# EAGLE board ECEN Autonomous SOLAR TRACKER (EAGLE 9.6.2)
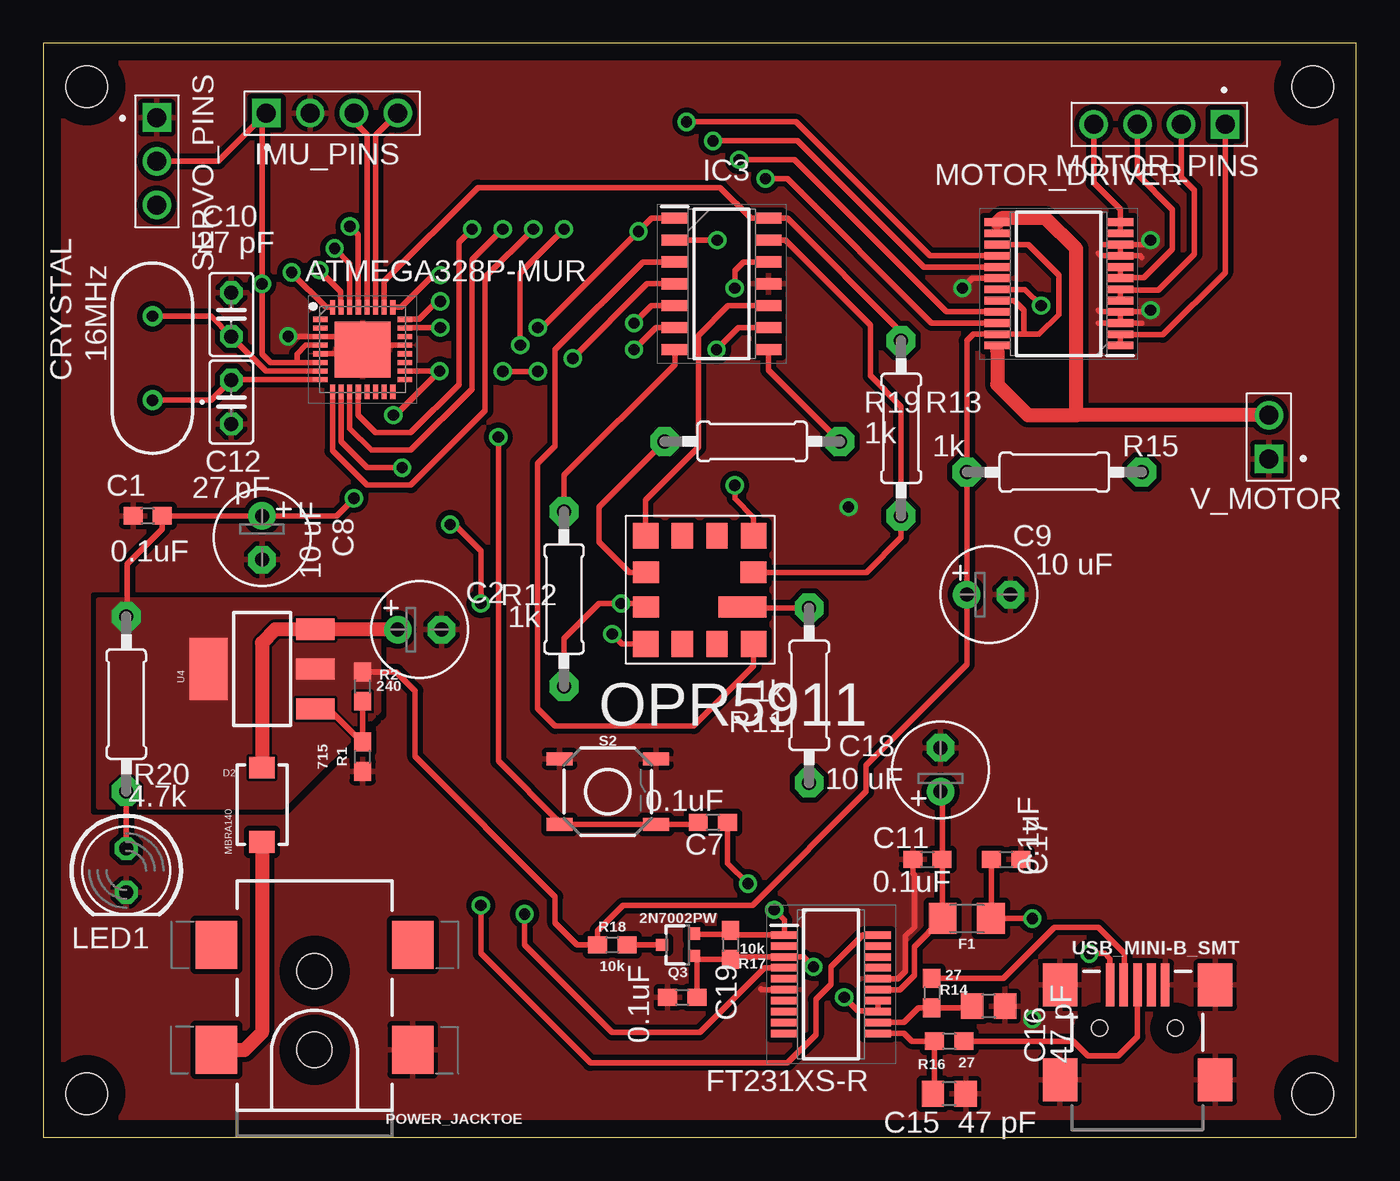
[diagram p0: board, top side]
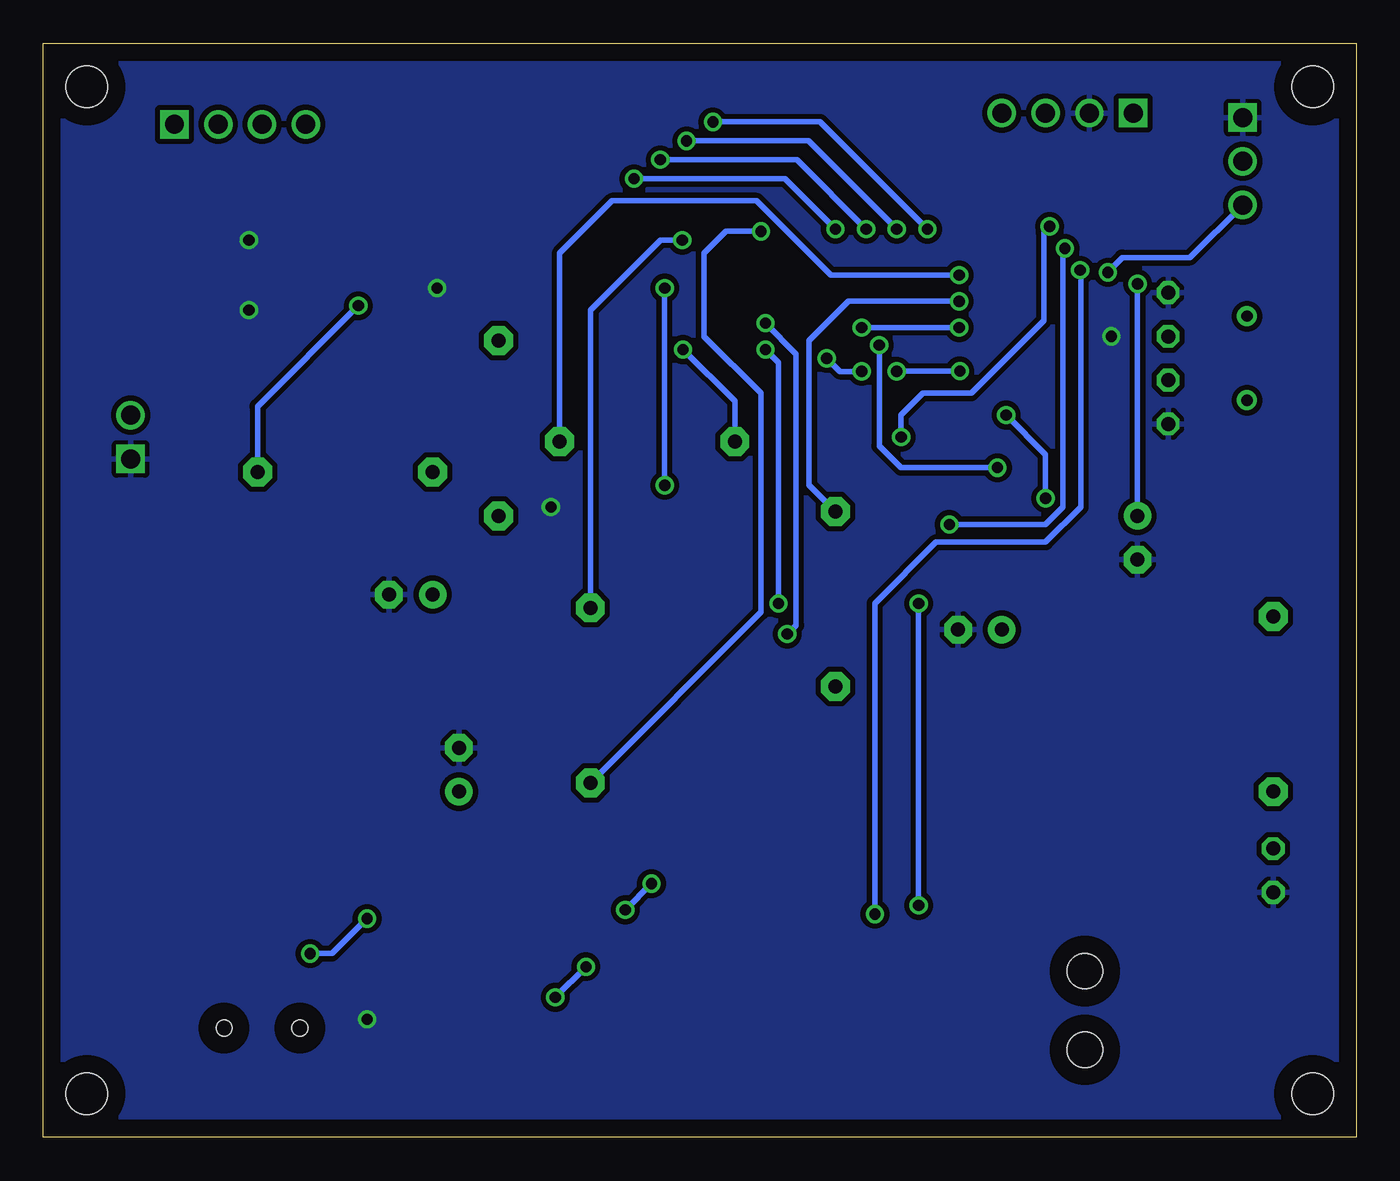
[diagram p1: board, bottom side, seen from below]

Size 76.2 x 63.5 mm. Coordinates in mm from the lower left corner, seen from the top.
Outline: 0,0 76.2,0 76.2,63.5 0,63.5 0,0
Copper layers (1*16): Top 0.035mm / dielectric 1.5mm / Bottom 0.035mm
Design rules "default *": minimum track width 6mil, minimum drill 0.6mm, track to track 6mil, track to pad 6mil, pad to pad 6mil, via to via 6mil, smd to smd 6mil, copper to edge 40mil, drill to drill 6mil, minimum pad ring 10mil, minimum via ring 8mil, stop-mask expansion 4mil, vias tented up to drill 0mil, thermal gap 10mil
Holes 2.4 mm at 2.54,2.54 2.54,60.96 73.66,60.96 73.66,2.54

## Footprints (pad centres in the part's own frame; a part is rotated, then mirrored left to right if it is on the bottom)
C0603 = smd 1.1 x 1: 1 -0.85,0; 2 0.85,0
E2,5-6 = drill 0.813 pad 1.6: + -1.27,0 | drill 0.813 pad 1.6 octagon: - 1.27,0
C025-025X050 = drill 0.813 octagon: 1 -1.27,0; 2 1.27,0
C0805 = smd 1.3 x 1.5: 1 -0.95,0; 2 0.95,0
HC49 = drill 0.65 pad 1.1: 1 -2.44,0; 2 2.44,0
SMA-DIODE = smd 1.27 x 1.47: A -2.15,0; C 2.15,0
1206 = smd 1.6 x 1.8: 1 -1.4,0; 2 1.4,0
QFN50P500X500X100-33N = smd 0.85 x 0.3: 1 -2.45,1.75; 2 -2.45,1.25; 3 -2.45,0.75; 4 -2.45,0.25; 5 -2.45,-0.25; 6 -2.45,-0.75; 7 -2.45,-1.25; 8 -2.45,-1.75; 17 2.45,-1.75; 18 2.45,-1.25; 19 2.45,-0.75; 20 2.45,-0.25; 21 2.45,0.25; 22 2.45,0.75; 23 2.45,1.25; 24 2.45,1.75 | smd 0.3 x 0.85: 9 -1.75,-2.45; 10 -1.25,-2.45; 11 -0.75,-2.45; 12 -0.25,-2.45; 13 0.25,-2.45; 14 0.75,-2.45; 15 1.25,-2.45; 16 1.75,-2.45; 25 1.75,2.45; 26 1.25,2.45; 27 0.75,2.45; 28 0.25,2.45; 29 -0.25,2.45; 30 -0.75,2.45; 31 -1.25,2.45; 32 -1.75,2.45 | smd 3.25 x 3.25: 33 0,0
SOP64P599X175-20N = smd 1.526 x 0.435: 1 -2.712,2.858; 2 -2.712,2.222; 3 -2.712,1.588; 4 -2.712,0.952; 5 -2.712,0.318; 6 -2.712,-0.318; 7 -2.712,-0.952; 8 -2.712,-1.588; 9 -2.712,-2.222; 10 -2.712,-2.858; 11 2.712,-2.858; 12 2.712,-2.222; 13 2.712,-1.588; 14 2.712,-0.952; 15 2.712,-0.318; 16 2.712,0.318; 17 2.712,0.952; 18 2.712,1.588; 19 2.712,2.222; 20 2.712,2.858
SOIC127P600X175-14N = smd 1.525 x 0.65: 1 -2.712,3.81; 2 -2.712,2.54; 3 -2.712,1.27; 4 -2.712,0; 5 -2.712,-1.27; 6 -2.712,-2.54; 7 -2.712,-3.81; 8 2.712,-3.81; 9 2.712,-2.54; 10 2.712,-1.27; 11 2.712,0; 12 2.712,1.27; 13 2.712,2.54; 14 2.712,3.81
POWER_JACK_SMD_OVERPASTE_TOE = smd 2.8 x 2.4: GND 0,-5.7; P$4 6.1,-5.7; VIN0 0,5.7; VIN1 6.1,5.7 | hole 2.032: 0,0; 4.572,0
USB-MINIB = smd 2.5 x 0.5: D+ 2.5,0; D- 2.5,0.8; GND 2.5,-1.6; ID 2.5,-0.8; VBUS 2.5,1.6 | smd 2.5 x 2: S1 -3,4.5; S2 2.5,4.5; S3 -3,-4.5; S4 2.5,-4.5 | hole 0.9: 0,2.2; 0,-2.2
61300411121 = drill 1.1 square: 1 -3.81,0 | drill 1.1: 2 -1.27,0; 3 1.27,0; 4 3.81,0
LED5MM = drill 0.813 octagon: A -1.27,0; K 1.27,0
SOP65P760X160-24N = smd 1.525 x 0.45: 1 -3.562,3.575; 2 -3.562,2.925; 3 -3.562,2.275; 4 -3.562,1.625; 5 -3.562,0.975; 6 -3.562,0.325; 7 -3.562,-0.325; 8 -3.562,-0.975; 9 -3.562,-1.625; 10 -3.562,-2.275; 11 -3.562,-2.925; 12 -3.562,-3.575; 13 3.562,-3.575; 14 3.562,-2.925; 15 3.562,-2.275; 16 3.562,-1.625; 17 3.562,-0.975; 18 3.562,-0.325; 19 3.562,0.325; 20 3.562,0.975; 21 3.562,1.625; 22 3.562,2.275; 23 3.562,2.925; 24 3.562,3.575
OPR5911-12 = smd 2.78 x 1.245: 1 6.349,2.904 | smd 1.47 x 1.499: 2 7.004,0.75; 5 0.738,0.75; 8 0.738,7.037; 11 7.004,7.037 | smd 1.245 x 1.499: 3 4.873,0.764; 4 2.863,0.764; 9 2.863,7.037; 10 4.873,7.037 | smd 1.499 x 1.245: 6 0.751,2.904; 7 0.751,4.914; 12 6.991,4.914
SOT323 = smd 0.7 x 0.7: 1 -0.65,-0.925; 2 0.65,-0.925; 3 0,0.925
0603 = smd 1.1 x 1: 1 -0.85,0; 2 0.85,0
0207/10 = drill 0.813 pad 1.676 octagon: 1 -5.08,0; 2 5.08,0
TACTILE_SWITCH_SMD_5.2MM = smd 1.524 x 0.762: 1 -2.794,1.905; 2 2.794,1.905; 3 -2.794,-1.905; 4 2.794,-1.905
61300311121 = drill 1.1 square: 1 -2.54,0 | drill 1.1: 2 0,0; 3 2.54,0
SOT223 = smd 1.219 x 2.235: 1 -2.311,-3.099; 2 0,-3.099; 3 2.311,-3.099 | smd 3.6 x 2.2: 4 0,3.099
61300211121 = drill 1.1 square: 1 -1.27,0 | drill 1.1: 2 1.27,0

## Placement (x,y rotation side)
C1  0.1uF  [C0603]  6.07,36.07 180 top
C2  47 uF  [E2,5-6]  21.84,29.46 0 top
C7  0.1uF  [C0603]  38.86,18.29 180 top
C8  10 uF  [E2,5-6]  12.7,34.8 270 top
C9  10 uF  [E2,5-6]  54.86,31.5 0 top
C10  27 pF  [C025-025X050]  10.92,47.75 90 top
C11  0.1uF  [C0603]  51.31,16.13 0 top
C12  27 pF  [C025-025X050]  10.92,42.67 90 top
C15  47 pF  [C0805]  52.58,2.54 180 top
C16  47 pF  [C0805]  54.86,7.62 180 top
C17  0.1uF  [C0603]  55.88,16.13 0 top
C18  10 uF  [E2,5-6]  52.07,21.34 90 top
C19  0.1uF  [C0603]  37.08,8.13 180 top
CRYSTAL  16MHz  [HC49]  6.35,45.21 90 top
D2  MBRA140  [SMA-DIODE]  12.7,19.3 90 top
F1  6V/0.5A  [1206]  53.59,12.7 180 top
IC1  ATMEGA328P-MUR  [QFN50P500X500X100-33N]  18.54,45.72 0 top
IC2  FT231XS-R  [SOP64P599X175-20N]  45.72,8.89 0 top
IC3  OPA4140AID  [SOIC127P600X175-14N]  39.37,49.53 0 top
J1  POWER_JACKTOE  [POWER_JACK_SMD_OVERPASTE_TOE]  15.75,5.08 90 top
J2  USB_MINI-B_SMT  [USB-MINIB]  63.5,6.35 90 top
J4  IMU_PINS  [61300411121]  16.76,59.44 0 top
LED1  [LED5MM]  4.83,15.49 270 top
MOTOR_DRIVER  TB6612FNG,C,8,EL  [SOP65P760X160-24N]  58.93,49.53 180 top
MOTOR_PINS  61300411121  [61300411121]  64.77,58.78 180 top
OPR5911  OPR5911  [OPR5911-12]  34.23,27.88 0 top
Q3  2N7002PW  [SOT323]  36.83,11.18 90 top
R1  715  [0603]  18.54,22.1 90 top
R2  240  [0603]  18.54,26.16 90 top
R11  1k  [0207/10]  44.45,25.65 90 top
R12  1k  [0207/10]  30.23,31.24 270 top
R13  1k  [0207/10]  49.78,41.15 90 top
R14  27  [0603]  51.56,8.38 270 top
R15  1k  [0207/10]  58.67,38.61 0 top
R16  27  [0603]  52.58,5.59 180 top
R17  10k  [0603]  39.88,11.18 270 top
R18  10k  [0603]  33.02,11.18 180 top
R19  1k  [0207/10]  41.15,40.39 0 top
R20  4.7k  [0207/10]  4.83,25.15 90 top
S2  [TACTILE_SWITCH_SMD_5.2MM]  32.77,20.07 0 top
SERVO_PINS  61300311121  [61300311121]  6.6,56.64 270 top
U4  [SOT223]  12.7,27.18 90 top
V_MOTOR  61300211121  [61300211121]  71.12,40.64 90 top

## Library data of the parts
C1 C2 C7-C12 C15-C19 = rcl; SPICEPREFIX: C
CRYSTAL = HC-49_U-S16000000ABJB; DESCRIPTION: Crystals 16MHz 18pF HC49S THROUGH HOLE; HEIGHT: mm; MANUFACTURER_NAME: Citizen Finetech Miyota; MANUFACTURER_PART_NUMBER: HC-49/U-S16000000ABJB; MOUSER_PART_NUMBER: 695-HC49US16.0ABJB; MOUSER_PRICE-STOCK: https://www.mouser.co.uk/ProductDetail/Citizen-FineDevice/HC-49-U-S16000000ABJB?qs=byeeYqUIh0M5kN9OYTo1Hw%3D%3D
D2 = MBRA140; AVAILABILITY: Bad; DESCRIPTION: Diode Schottky 40V 1A Surface Mount SMA; MF: ON Semiconductor; MP: MBRA140; PACKAGE: DO-214 ON Semiconductor; PRICE: None
F1 = SparkFun-Fuses; PROD_ID: RES-08585
IC1 = ATMEGA328P-MUR; ARROW_PART_NUMBER: ATMEGA328P-MUR; ARROW_PRICE-STOCK: https://www.arrow.com/en/products/atmega328p-mur/microchip-technology; DESCRIPTION: MCU 8-bit ATmega AVR RISC 32KB Flash 2.5V/3.3V/5V 32-Pin VQFN EP T/R; HEIGHT: 1mm; MANUFACTURER_NAME: Microchip; MANUFACTURER_PART_NUMBER: ATMEGA328P-MUR; MOUSER_PART_NUMBER: 556-ATMEGA328P-MUR; MOUSER_PRICE-STOCK: https://www.mouser.co.uk/ProductDetail/Microchip-Technology-Atmel/ATMEGA328P-MUR?qs=6Dg1WZIWLC7u6Xm9ddn7Uw%3D%3D
IC2 = FT231XS-R; DESCRIPTION: USB SSOP-20 RoHS; HEIGHT: 1.753mm; MANUFACTURER_NAME: Future Designs; MANUFACTURER_PART_NUMBER: FT231XS-R
IC3 = OPA4140AID; ARROW_PART_NUMBER: OPA4140AID; ARROW_PRICE-STOCK: https://www.arrow.com/en/products/opa4140aid/texas-instruments; DESCRIPTION: TI,OPA4140AID,IC,Op Amp Texas Instruments OPA4140AID, Quad JFET Op Amp, 11MHz Rail-Rail, 4.5 36 V, 14-Pin SOIC; HEIGHT: 1.75mm; MANUFACTURER_NAME: Texas Instruments; MANUFACTURER_PART_NUMBER: OPA4140AID; MOUSER_PART_NUMBER: 595-OPA4140AID; MOUSER_PRICE-STOCK: https://www.mouser.com/Search/Refine.aspx?Keyword=595-OPA4140AID
J1 = SparkFun-Connectors; PROD_ID: CONN-08106; SF_ID: PRT-12748
J2 = SparkFun-Connectors; PROD_ID: CONN-08193; SF_ID: PRT-00587
J4 MOTOR_PINS = Headers; CREATED_BY: PCBLayout.com; DIGI_KEY_PART_NUMBER: 732-5317-ND; MANUFACTURER: Wurth Electronics Inc.; MPN: 61300411121
LED1 = led
MOTOR_DRIVER = TB6612FNG_C_8_EL; ARROW_PART_NUMBER: TB6612FNG,C,8,EL; ARROW_PRICE-STOCK: https://www.arrow.com/en/products/tb6612fngc8el/toshiba; DESCRIPTION: otor / Motion / Ignition Controllers & Drivers Brush Motor Driver IC; HEIGHT: 1.6mm; MANUFACTURER_NAME: Toshiba; MANUFACTURER_PART_NUMBER: TB6612FNG,C,8,EL; MOUSER_PART_NUMBER: 757-TB6612FNGC8EL; MOUSER_PRICE-STOCK: https://www.mouser.co.uk/ProductDetail/Toshiba/TB6612FNGC8EL?qs=rsevcuukUAy2UalRuv4E%2FQ%3D%3D
OPR5911 = OPR5911
Q3 = SparkFun-DiscreteSemi; PROD_ID: TRANS-11151
R1 = SparkFun-Resistors; PROD_ID: RES-07850
R2 = SparkFun-Resistors; PROD_ID: RES-07849
R11-R13 R15 R19 R20 = adafruit
R14 R16-R18 = SparkFun-Resistors; PROD_ID: RES-07857
S2 = SparkFun-Switches; PROD_ID: SWCH-08247; SF_SKU: COM-08720
SERVO_PINS = Headers; CREATED_BY: PCBLayout.com; DIGI_KEY_PART_NUMBER: 732-5316-ND; MANUFACTURER: Wurth Electronics Inc.; MPN: 61300311121
U4 = SparkFun-IC-Power; PROD_ID: VREG-08170
V_MOTOR = Headers; CREATED_BY: PCBLayout.com; DIGI_KEY_PART_NUMBER: 732-5315-ND; MANUFACTURER: Wurth Electronics Inc.; MPN: 61300211121

## Nets
3V3OUT: C19.1 IC2.3 IC2.13 IC2.14 Q3.1 R17.2
+IN_A: IC3.3 OPR5911.2
+IN_B: IC3.5 OPR5911.5
+IN_C: IC3.10 OPR5911.8
+IN_D: IC3.12 OPR5911.11
A0: IC1.23 IC3.1 R11.1
A1: IC1.24 IC3.7 R12.1
A2: IC1.25 IC3.8 R19.2
A3: IC1.26 IC3.14 R13.2
A+: MOTOR_DRIVER.1 MOTOR_DRIVER.2 MOTOR_PINS.1
A-: MOTOR_DRIVER.5 MOTOR_DRIVER.6 MOTOR_PINS.2
AIN1: IC1.9 MOTOR_DRIVER.21
AIN2: IC1.10 MOTOR_DRIVER.22
B+: MOTOR_DRIVER.11 MOTOR_DRIVER.12 MOTOR_PINS.4
B-: MOTOR_DRIVER.7 MOTOR_DRIVER.8 MOTOR_PINS.3
BIN1: IC1.11 MOTOR_DRIVER.17
BIN2: IC1.12 MOTOR_DRIVER.16
DTR: C7.1 IC2.1 Q3.2 R17.1
GND: C1.2 C2.- C8.- C9.- C10.2 C11.1 C12.1 C15.1 C16.1 C17.2 C18.- C19.2 IC1.3 IC1.5 IC1.21 IC1.33 IC2.6 IC2.16 IC3.11 J1.GND J2.GND J2.S1 J2.S2 J2.S3 J2.S4 J4.2 LED1.K MOTOR_DRIVER.3 MOTOR_DRIVER.4 MOTOR_DRIVER.9 MOTOR_DRIVER.10 MOTOR_DRIVER.18 R1.1 S2.1 S2.2 SERVO_PINS.1 V_MOTOR.1
N$1: C2.+ D2.C U4.3
N$4: C15.2 IC2.11 R16.2
N$5: D2.A J1.VIN0
N$6: LED1.A R20.1
N$7: IC3.2 OPR5911.1 R11.2
N$8: R1.2 R2.1 U4.1
N$9: C7.2 IC1.29 S2.3 S2.4
N$10: C16.2 IC2.12 R14.2
N$11: IC3.6 OPR5911.6 R12.2
N$12: C10.1 CRYSTAL.2 IC1.7
N$13: IC3.13 OPR5911.12 R13.1
N$14: IC3.9 OPR5911.7 R19.1
N$15: C12.2 CRYSTAL.1 IC1.8
N$16: MOTOR_DRIVER.19 R15.2
N$21: C17.1 F1.1 J2.VBUS
N$22: J2.D- R14.1
N$23: J2.D+ R16.1
N$24: C11.2 C18.+ F1.2 IC2.15
N$26: Q3.3 R18.1
RX-I: IC1.30 IC2.20
SCL_3V: IC1.28 J4.3
SDA_3V: IC1.27 J4.4
SERVO_PWM: IC1.32 SERVO_PINS.3
TX-O: IC1.31 IC2.4
VIN: C1.1 C8.+ C9.+ IC1.4 IC1.6 IC1.18 IC3.4 J4.1 MOTOR_DRIVER.15 MOTOR_DRIVER.20 MOTOR_DRIVER.23 R2.2 R15.1 R18.2 R20.2 SERVO_PINS.2 U4.2 U4.4
VMOTOR: MOTOR_DRIVER.13 MOTOR_DRIVER.14 MOTOR_DRIVER.24 V_MOTOR.2

## Tracks (layer width: path | path; a pad name or v marks a point on that pad's centre or on a via)
3V3OUT  (via drill 0.65)
  Top 0.305: C19.1 37.93,10.35 Q3.1 37.95,10.33 R17.2 40.03,10.48 IC2.3 44.13,10.48 v44.7,9.91 | IC2.13 48.43,7.34 | 48.43,7.34 IC2.14 | v46.48,8.13 47.27,7.34 48.43,7.34
  Bottom 0.305: v44.7,9.91 v46.48,8.13
+IN_A
  Top 0.305: OPR5911.2 41.23,27.36 37.75,23.88 29.72,23.88 28.7,24.89 28.7,39.12 29.72,40.13 29.72,45.72 34.8,50.8 IC3.3
+IN_B  (via drill 0.65)
  Top 0.305: OPR5911.5 33.6,28.63 v33.02,29.21 | IC3.5 35.31,48.26 v34.29,47.24
  Bottom 0.305: v33.02,29.21 32.51,29.72 32.51,45.47 v34.29,47.24
+IN_C
  Top 0.305: OPR5911.8 34.97,37 38.02,40.06 38.02,46.53 39.75,48.26 IC3.10
+IN_D  (via drill 0.65)
  Top 0.305: OPR5911.11 41.23,35.98 40.13,37.08 v40.13,37.85 | v40.13,49.28 40.13,50.29 40.64,50.8 IC3.12
  Bottom 0.305: v40.13,37.85 v40.13,49.28
A0  (via drill 0.65)
  Top 0.305: v28.7,46.99 28.96,46.99 v34.54,52.58 35.31,53.34 IC3.1 | IC1.23 21.01,46.99 v23.05,46.99
  Bottom 0.305: R11.1 34.54,30.48 34.54,43.18 37.85,46.48 37.85,51.31 36.58,52.58 v34.54,52.58 | v23.05,46.99 v28.7,46.99
A1  (via drill 0.65)
  Top 0.305: R12.1 30.23,38.42 36.66,44.86 IC3.7 | IC1.24 21.83,47.47 22.87,48.51 v23.05,48.51
  Bottom 0.305: v23.05,48.51 29.46,48.51 31.75,46.23 31.75,37.85 R12.1
A2  (via drill 0.65)
  Top 0.305: R19.2 42.08,44.53 IC3.8 | IC1.25 20.77,48.17 22.64,50.04 v23.05,50.04
  Bottom 0.305: v23.05,50.04 30.48,50.04 34.8,54.36 43.18,54.36 46.23,51.31 R19.2
A3
  Top 0.305: IC1.26 19.79,49.67 25.24,55.12 39.29,55.12 41.07,53.34 IC3.14 43.18,53.34 49.78,46.74 R13.2
A+
  Top 0.305: MOTOR_DRIVER.2 62.49,46.48 | 62.49,46.48 MOTOR_DRIVER.1 | 62.49,46.48 62.58,46.57 64.97,46.57 68.58,50.19 MOTOR_PINS.1
A-
  Top 0.305: MOTOR_DRIVER.6 62.49,49.17 | 62.49,49.17 MOTOR_DRIVER.5 | 62.49,49.17 64.71,49.17 66.8,51.26 66.8,54.97 66.04,55.73 MOTOR_PINS.2
AIN1  (via drill 0.65)
  Top 0.305: IC1.9 16.79,39.85 18.8,37.85 21.34,37.85 25.65,42.16 25.65,49.91 v28.45,52.7 | MOTOR_DRIVER.21 52.42,47.91 43.6,56.73 v40.39,56.73
  Bottom 0.305: v40.39,56.73 32.47,56.73 v28.45,52.7
AIN2  (via drill 0.65)
  Top 0.305: IC1.10 17.29,40.37 18.8,38.86 v20.83,38.86 | MOTOR_DRIVER.22 51.55,47.26 43.18,55.63 v41.91,55.63 | v30.23,52.7 27.69,50.16 v27.69,45.97
  Bottom 0.305: v30.23,52.7 33.15,55.63 v41.91,55.63 | v20.83,38.86 26.42,38.86 27.69,40.13 v27.69,45.97
B+
  Top 0.305: MOTOR_DRIVER.11 MOTOR_DRIVER.12 62.49,53.87 60.96,55.4 MOTOR_PINS.4
B-
  Top 0.305: MOTOR_DRIVER.8 62.49,49.89 | 62.49,49.89 MOTOR_DRIVER.7 | MOTOR_PINS.3 63.5,55.88 65.53,53.85 65.53,51.55 63.87,49.89 62.49,49.89
BIN1  (via drill 0.65)
  Top 0.305: IC1.11 17.79,41.14 19.05,39.88 21.34,39.88 24.89,43.43 24.89,50.93 v26.67,52.7 | MOTOR_DRIVER.17 51.09,50.51 43.77,57.83 v38.86,57.83
  Bottom 0.305: v38.86,57.83 31.79,57.83 v26.67,52.7
BIN2  (via drill 0.65)
  Top 0.305: IC1.12 18.29,41.91 19.3,40.89 21.34,40.89 24.13,43.69 24.13,51.94 v24.89,52.7 | MOTOR_DRIVER.16 51.46,51.16 43.69,58.93 v37.34,58.93
  Bottom 0.305: v37.34,58.93 31.11,58.93 v24.89,52.7
DTR  (via drill 0.65)
  Top 0.305: Q3.2 37.81,11.77 39.62,11.77 R17.1 40.16,11.75 IC2.1 43.01,12.62 v42.42,13.21 | C7.1 39.71,15.91 v40.89,14.73
  Bottom 0.305: v40.89,14.73 v42.42,13.21
GND  (via drill 0.65)
  Top 0.305: MOTOR_DRIVER.3 MOTOR_DRIVER.4 | MOTOR_DRIVER.9 MOTOR_DRIVER.10 | MOTOR_DRIVER.18 53.92,49.85 v53.34,49.28 | MOTOR_DRIVER.10 63.76,51.8 63.77,51.82 64.01,51.82 v64.26,52.07 | MOTOR_DRIVER.4 64.16,47.91 v64.26,48.01 | v14.22,46.48 15.49,46.48 15.51,46.47 IC1.3 18.29,46.47 18.79,45.97 | IC1.5 18.29,45.47 IC1.33 18.79,45.97 | IC1.21 18.79,45.97 | MOTOR_DRIVER.10 61.48,51.8 61.47,51.82 | MOTOR_DRIVER.9 61.37,51.16 61.21,51.31 | MOTOR_DRIVER.9 63.65,51.16 63.75,51.05 | MOTOR_DRIVER.3 63.74,47.26 63.75,47.24 | MOTOR_DRIVER.3 62.48,47.24 61.21,47.24 | MOTOR_DRIVER.4 61.31,47.91 61.21,48.01 | IC2.6 41.72,8.57 41.66,8.64 | IC2.16 49.59,9.21 50.04,9.65 50.04,11.68 50.55,12.19 50.55,15.24 50.46,15.33 C11.1
  other vias: 46.74,36.58 57.4,6.86
  pour Top (isolate 0.305, rank 2): -2.54,-2.54 -2.54,66.04 76.71,66.04 76.71,-2.54
  pour Bottom (isolate 0.305): -3.81,-2.54 -3.81,66.04 77.22,66.04 77.22,-2.54
N$1
  Top 0.305: 20.55,29.49 C2.+
  Top 0.813: D2.C 12.7,28.7 13.49,29.49 U4.3 20.55,29.49
N$4
  Top 0.305: IC2.11 49.96,6.03 50.4,5.59 R16.2 51.73,2.64 C15.2
N$5
  Top 0.813: J1.VIN0 11.68,5.08 12.7,6.1 D2.A
N$6
  Top 0.305: R20.1 LED1.A
N$7  (via drill 0.65)
  Top 0.305: R11.2 40.62,30.73 OPR5911.1 | IC3.2 v39.12,52.07
  Bottom 0.305: v39.12,52.07 40.39,52.07 44.45,48.01 R11.2
N$8
  Top 0.305: R1.2 18.49,23 18.45,22.97 16.56,24.87 U4.1 | 18.5,25.27 R2.1 R1.2 | R1.2 18.43,23.07
N$9  (via drill 0.65)
  Top 0.305: C7.2 37.88,18.16 S2.4 S2.3 29.97,18.29 26.42,21.84 v26.42,40.64 | IC1.29 18.29,49.78 18.29,52.38 v17.8,52.86
  Bottom 0.305: v26.42,40.64 26.42,41.91 25.15,43.18 22.35,43.18 18.14,47.4 18.14,52.53 v17.8,52.86
N$10
  Top 0.305: IC2.12 49.94,6.67 50.8,7.53 R14.2 53.83,7.53 C16.2
N$11  (via drill 0.65)
  Top 0.305: R12.2 30.23,28.96 32.26,30.99 v33.53,30.99 34.77,30.99 OPR5911.6 | IC3.6 35.56,46.99 v34.29,45.72
  Bottom 0.305: v34.29,45.72 33.53,44.96 v33.53,30.99
N$12
  Top 0.305: CRYSTAL.2 9.75,47.65 C10.1 12.93,44.47 IC1.7
N$13
  Top 0.305: OPR5911.12 47.78,32.79 49.78,34.8 R13.1 49.78,42.42 48.01,44.2 48.01,47.14 43.08,52.07 IC3.13
N$14  (via drill 0.65)
  Top 0.305: OPR5911.7 34.01,32.79 32.26,34.54 32.26,36.58 R19.1 | IC3.9 40.34,46.99 v39.06,45.72
  Bottom 0.305: v39.06,45.72 36.07,42.72 R19.1
N$15
  Top 0.305: CRYSTAL.1 9.75,42.77 C12.2 10.95,43.97 IC1.8
N$16  (via drill 0.65)
  Top 0.305: MOTOR_DRIVER.19 56.97,49.2 v57.91,48.26
  Bottom 0.305: v57.91,48.26 63.75,42.42 R15.2
N$21  (via drill 0.65)
  Top 0.305: C17.1 55.03,12.74 F1.1 v57.4,12.7 | J2.VBUS 61.9,10.37 61.59,10.68 v60.72,10.68 v60.71,10.67
  Bottom 0.305: v60.71,10.67 59.44,10.67 v57.4,12.7
N$22
  Top 0.305: R14.1 55.71,9.23 58.67,12.19 61.21,12.19 62.74,10.67 62.74,8.89 J2.D-
N$23
  Top 0.305: J2.D+ 63.5,5.84 62.39,4.73 60.63,4.73 59.77,5.59 R16.1
N$24
  Top 0.305: IC2.15 49.72,8.57 50.55,9.4 50.55,11.05 F1.2 52.19,16.09 | 52.19,16.09 52.19,16.22 52.19,19.94 C18.+ | 52.19,16.09 C11.2
N$26
  Top 0.305: Q3.3 R18.1
RX-I  (via drill 0.65)
  Top 0.305: IC2.20 47.56,11.75 45.72,9.91 45.72,8.89 44.83,8 44.83,5.97 43.18,4.32 31.75,4.32 25.4,10.67 v25.4,13.46 | v23.62,35.56 23.88,35.56 25.4,34.04 v25.4,30.99 | IC1.30 17.79,50.71 v16.92,51.59
  Bottom 0.305: v25.4,30.99 v25.4,13.46 | v16.92,51.59 17.02,51.49 17.02,36.58 18.03,35.56 v23.62,35.56
SCL_3V
  Top 0.305: IC1.28 18.79,58.17 18.03,58.93 J4.3
SDA_3V
  Top 0.305: IC1.27 19.29,58.15 J4.4
SERVO_PWM  (via drill 0.65)
  Top 0.305: IC1.32 16.42,48.17 14.43,50.16 v14.43,50.19
  Bottom 0.305: SERVO_PINS.3 9.65,51.05 13.59,51.05 14.43,50.22 v14.43,50.19
TX-O  (via drill 0.65)
  Top 0.305: IC2.4 41.85,9.84 38.1,6.1 33.02,6.1 27.94,11.18 v27.94,12.95 | IC1.31 17.27,48.19 17.27,49.07 v16.03,50.32
  Bottom 0.305: v27.94,12.95 27.94,30.99 24.38,34.54 18.03,34.54 16,36.58 16,50.09 16.03,50.06 v16.03,50.32
VIN  (via drill 0.65)
  Top 0.305: IC1.6 14.73,44.97 | 14.73,44.97 13.2,44.97 12.7,45.47 v12.7,49.53 12.7,59.18 J4.1 10.16,56.64 SERVO_PINS.2 | R20.2 4.89,30.29 4.89,33.27 6.92,35.31 C1.1 C8.+ 17.02,36.07 v18.03,37.08 | IC3.4 35.05,49.53 v30.73,45.21 | v26.67,44.45 v28.7,44.45 | MOTOR_DRIVER.15 57.16,51.8 58.93,50.04 58.93,47.75 57.78,46.6 56.9,46.6 | 56.9,46.6 MOTOR_DRIVER.23 53.97,46.6 53.59,46.23 C9.+ R15.1 53.59,27.43 47.75,21.59 47.75,20.07 41.15,13.46 33.64,13.46 32.17,11.99 R18.2 30.99,11.18 29.72,12.45 29.72,13.97 21.59,22.1 21.59,25.91 20.49,27.01 R2.2 | MOTOR_DRIVER.20 56.35,48.55 56.9,48.01 56.9,46.6 | IC1.4 15.24,45.97 14.73,45.47 14.73,44.97 | IC1.18 v23,44.47 v23.01,44.46 20.46,41.91 v20.32,41.91
  Bottom 0.305: v12.7,49.53 C8.+ | v26.67,44.45 26.66,44.46 v23.01,44.46 | v30.73,45.21 29.97,44.45 v28.7,44.45 | v20.32,41.91 18.03,39.62 v18.03,37.08
  pour Top (no thermals): 3.23,31.19 3.23,19.18 13.84,19.18 19.46,24.79 19.46,31.19
VMOTOR
  Top 0.305: MOTOR_DRIVER.24 55.37,45.67
  Top 0.813: V_MOTOR.2 59.94,41.91 | 55.37,45.67 55.37,43.69 57.15,41.91 59.94,41.91 | 59.94,41.91 59.94,51.56 58.17,53.34 55.6,53.34 MOTOR_DRIVER.13
  pour Top (no thermals): 55.12,53.09 55.12,52.32 55.63,52.32 55.63,53.09